# EAGLE board PololuPCBwhatonearth (EAGLE 8.3.2)
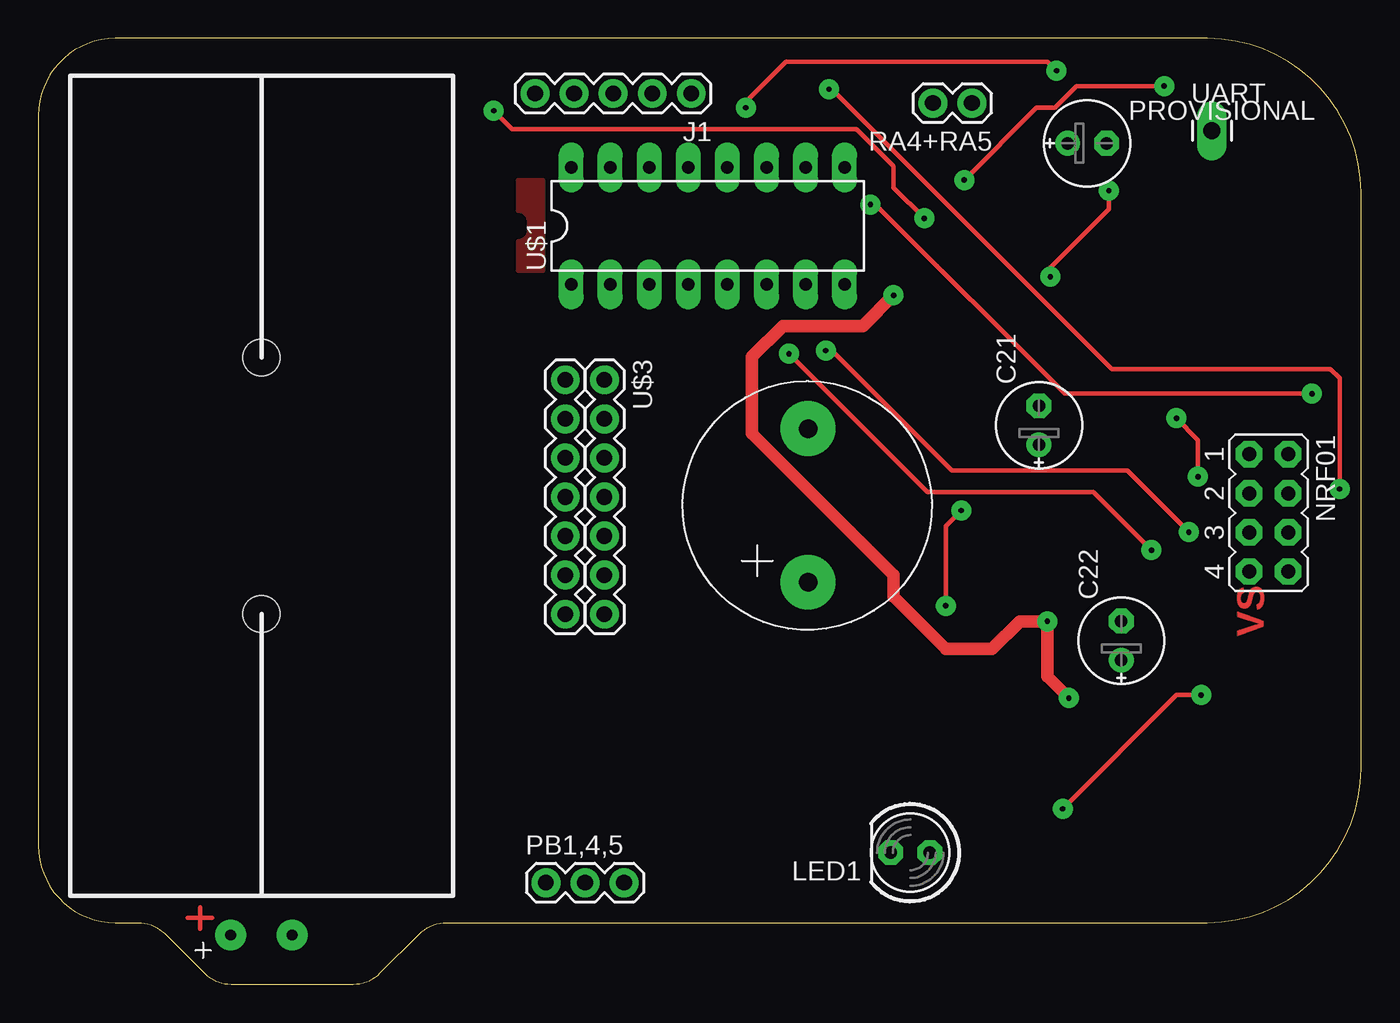
[diagram p0: board, top side]
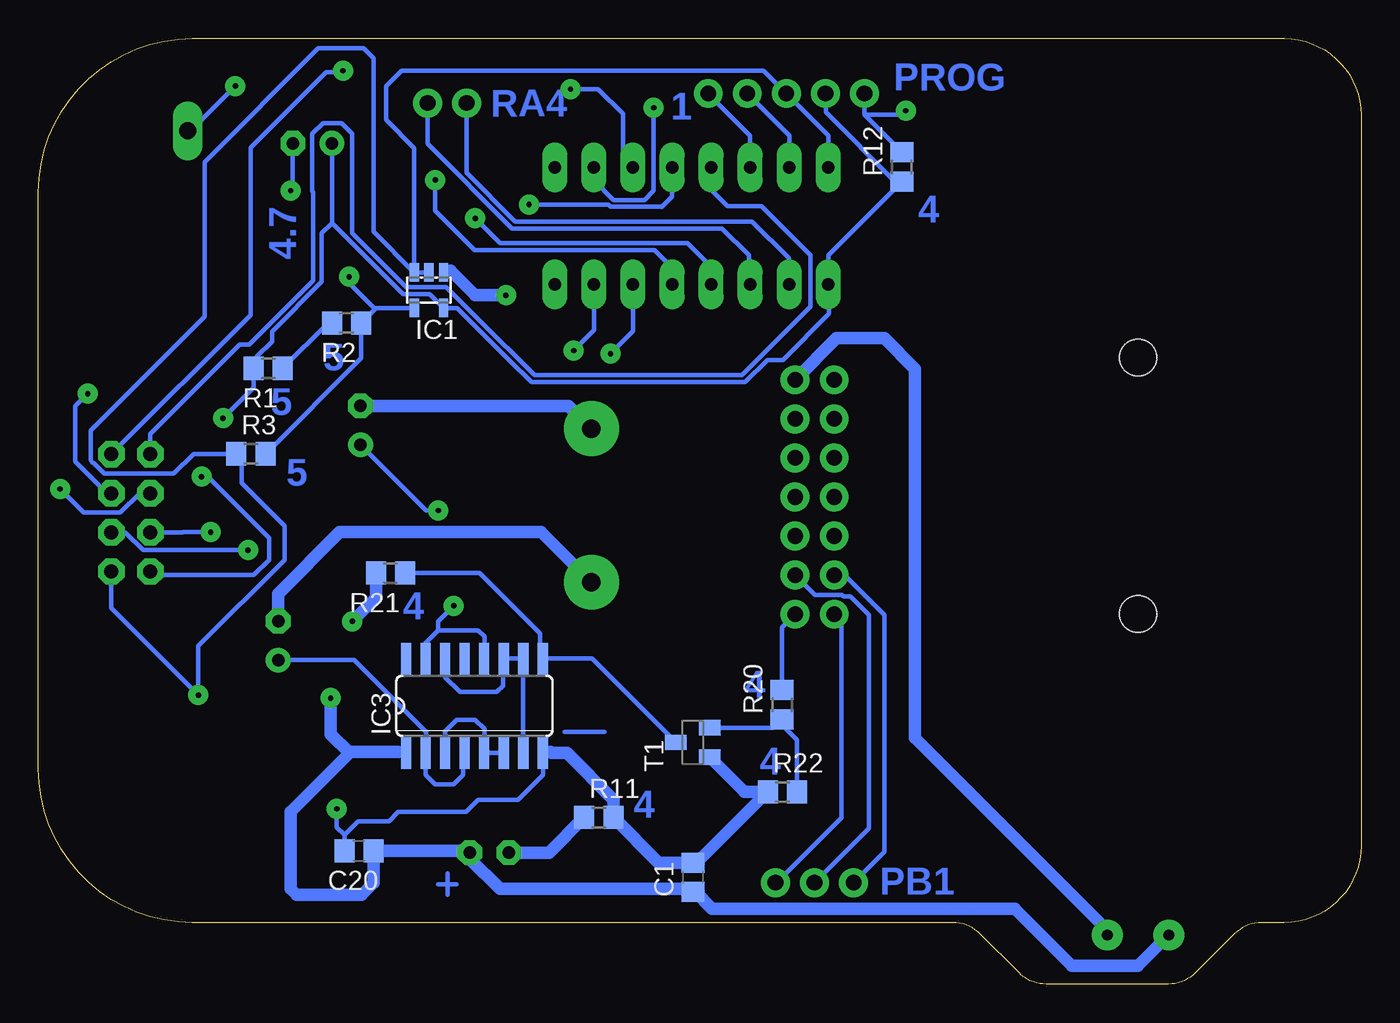
[diagram p1: board, bottom side, seen from below]

Size 86 x 61.5 mm. Coordinates in mm from the lower left corner, seen from the top.
Outline: 76,61.5 5,61.5 arc90 0,56.5 0,9 arc90 5,4 6.46,4 arc-45 8.23,3.27 10.77,0.73 arc45 12.54,0 20.46,0 arc45 22.23,0.73 24.77,3.27 arc-45 26.54,4 76,4 arc90 86,14 86,51.5 arc90 76,61.5
Copper layers (1*16): Top 0.06mm / dielectric 3mm / Bottom 0.06mm
Design rules "default *": minimum track width 0.3mm, minimum drill 0.35mm, track to track 0.15mm, track to pad 0.15mm, pad to pad 0.5mm, via to via 1mm, smd to smd 0mil, copper to edge 0.5mm, drill to drill 0.3mm, minimum pad ring 0.4mm, minimum via ring 0.4mm, stop-mask expansion 4mil, vias tented up to drill 0mil, thermal gap 10mil

## Footprints (pad centres in the part's own frame; a part is rotated, then mirrored left to right if it is on the bottom)
C0805 = smd 1.3 x 1.5: 1 -0.95,0; 2 0.95,0
E2,5-6E = drill 0.813 pad 1.575: + -1.27,0 | drill 0.813 pad 1.575 octagon: - 1.27,0
SOT23-5L = smd 0.6 x 1.2: 1 -0.95,-1.15; 2 0,-1.15; 3 0.95,-1.15; 4 0.95,1.15; 5 -0.95,1.15
SO16 = smd 0.66 x 2.032: 1 -4.445,-3.073; 2 -3.175,-3.073; 3 -1.905,-3.073; 4 -0.635,-3.073; 5 0.635,-3.073; 6 1.905,-3.073; 7 3.175,-3.073; 8 4.445,-3.073; 9 4.445,3.073; 10 3.175,3.073; 11 1.905,3.073; 12 0.635,3.073; 13 -0.635,3.073; 14 -1.905,3.073; 15 -3.175,3.073; 16 -4.445,3.073
1X05 = drill 1.016 pad 1.88: 1 0,0; 2 2.54,0; 3 5.08,0; 4 7.62,0; 5 10.16,0
LED5MM = drill 0.813 octagon: A -1.27,0; K 1.27,0
JP4Q = drill 0.914 octagon: 1 -3.81,-1.27; 2 -1.27,-1.27; 3 1.27,-1.27; 4 3.81,-1.27; 5 3.81,1.27; 6 1.27,1.27; 7 -1.27,1.27; 8 -3.81,1.27
1X03 = drill 1.016 pad 1.88: 1 0,0; 2 2.54,0; 3 5.08,0
R0805 = smd 1.3 x 1.5: 1 -0.95,0; 2 0.95,0
1X02 = drill 1.016 pad 1.88: 1 0,0; 2 2.54,0
SOT23-EBC = smd 1 x 1.4: B 0.95,-1.1; C 0,1.1; E -0.95,-1.1
DIL16 = drill 0.813 long: 1 -8.89,-3.81; 2 -6.35,-3.81; 3 -3.81,-3.81; 4 -1.27,-3.81; 5 1.27,-3.81; 6 3.81,-3.81; 7 6.35,-3.81; 8 8.89,-3.81; 9 8.89,3.81; 10 6.35,3.81; 11 3.81,3.81; 12 1.27,3.81; 13 -1.27,3.81; 14 -3.81,3.81; 15 -6.35,3.81; 16 -8.89,3.81
3V-AAA-BATTPACK = drill 0.7 pad 2: 1 0,-2; 2 0,2 | hole 2.388: -37.541,0; -20.879,0
2X07 = drill 1.016 pad 1.88: DB0 7.62,-2.54; DB1 7.62,0; DB2 10.16,-2.54; DB3 10.16,0; E 5.08,0; PB1 12.7,-2.54; PB4 12.7,0; PB5 15.24,-2.54; PD7 15.24,0; R/W 5.08,-2.54; RS 2.54,0; VDD 0,0; VO 2.54,-2.54; VSS 0,-2.54
1X01_LONGPAD = drill 1.118 pad 1.88 long: 1 0,0
ULTRASONIC-PEIZO = drill 1.2 pad 3.556: 1+ -5,0; 2- 5,0

## Placement (x,y rotation side)
C1  0.1uF  [C0805]  43.44,6.94 90 bottom
C20  0.1uF  [C0805]  65.15,8.67 180 bottom
C21  0.22uF  [E2,5-6E]  65.06,36.34 90 top
C22  0.22uF  [E2,5-6E]  70.41,22.34 90 top
IC1  TPS7700118RM  [SOT23-5L]  60.61,45.13 180 bottom
IC3  CD4049UBDRD  [SO16]  57.65,18.1 0 bottom
J1  [1X05]  42.45,57.92 180 top
LED1  [LED5MM]  56.69,8.55 180 top
NRF01  [JP4Q]  79.99,30.65 270 top
PB1,4,5  [1X03]  33,6.6 0 top
PROVISIONAL  4.7uF  [E2,5-6E]  68.19,54.68 0 top
R1  100K  [R0805]  71.06,40.05 180 bottom
R2  100K  [R0805]  65.96,43 180 bottom
R3  100K  [R0805]  72.19,34.49 0 bottom
R11  10K  [R0805]  49.57,10.84 0 bottom
R12  10K  [R0805]  29.86,53.15 90 bottom
R20  10K  [R0805]  37.65,18.18 90 bottom
R21  10K  [R0805]  63.11,26.73 180 bottom
R22  10K  [R0805]  37.62,12.5 0 bottom
RA4+RA5  [1X02]  60.7,57.3 180 top
T1  [SOT23-EBC]  43.46,15.72 90 bottom
U$1  PIC16F1503(DIL16)  [DIL16]  43.53,49.31 0 top
U$2  3V-AAA-BATTPACK  [3V-AAA-BATTPACK]  14.5,3.2 270 top
U$3  M2X7  [2X07]  36.8,39.3 270 top
UART  [1X01_LONGPAD]  76.3,55.5 0 top
US-TX  [ULTRASONIC-PEIZO]  50.04,31.13 90 top

## Library data of the parts
C1 C20-C22 PROVISIONAL = rcl
IC1 IC3 J1 NRF01 U$1-U$3 US-TX = gac_lib
LED1 = led
PB1,4,5 RA4+RA5 UART = SparkFun-Connectors
R1-R3 R11 R12 R20-R22 = resistor
T1 = transistor

## Nets
N$1: IC3.9 R21.1 T1.C
N$2: R20.2 U$3.PD7
N$3: IC3.7 IC3.10 IC3.11 IC3.14
N$4: IC3.3 IC3.5 IC3.6
N$5: C22.+ IC3.2 IC3.4
N$6: C1.2 C20.2 IC1.2 IC1.3 IC3.8 J1.3 NRF01.5 R3.1 R11.2 R22.1 T1.E U$1.16
N$7: C21.+ IC3.12 IC3.15
N$8: R20.1 R22.2 T1.B
N$9: IC1.5 J1.4 NRF01.4 PROVISIONAL.+ R1.2 R12.1 U$1.1
N$10: IC1.4 PROVISIONAL.- R2.1 R3.2
N$11: NRF01.1 U$1.13
N$12: NRF01.8 U$1.10
N$13: NRF01.3 U$1.7
N$14: R1.1 R2.2
N$15: NRF01.6 U$1.6
N$16: NRF01.2 U$1.11
N$17: NRF01.7 U$1.12
N$18: J1.2 U$1.15
N$19: J1.1 U$1.14
N$20: J1.5 R12.2 U$1.4
N$21: LED1.K R11.1
N$22: C22.- US-TX.1+
N$23: C21.- US-TX.2-
N$24: C1.1 C20.1 IC1.1 IC3.1 LED1.A R21.2 U$2.1
N$27: U$2.2 U$3.VDD
N$28: U$1.5 UART.1
N$29: RA4+RA5.2 U$1.2
N$30: RA4+RA5.1 U$1.3
N$31: PB1,4,5.2 U$3.PB4
N$32: PB1,4,5.1 U$3.PB1
N$33: PB1,4,5.3 U$3.PB5

## Tracks (layer width: path | path; a pad name or v marks a point on that pad's centre or on a via)
N$1
  Bottom 0.305: T1.C 50.01,21.17 IC3.9 53.4,21.37 53.4,22.8 57.33,26.73 R21.1
N$2
  Bottom 0.305: R20.2 37.65,23.21 U$3.PD7
N$3
  Bottom 0.305: IC3.7 IC3.10 IC3.11 55.8,21.12 55.8,19.4 56.2,19 58.6,19 59.55,19.95 IC3.14
N$4
  Bottom 0.305: IC3.6 IC3.5 57,15.04 57,16.6 57.6,17.2 58.8,17.2 59.55,16.45 IC3.3
N$5
  Bottom 0.305: IC3.4 58.4,14.91 58.4,13.6 59,13 60.2,13 60.83,13.62 IC3.2 60.8,15.05 60.8,16.4 65.47,21.07 C22.+
N$6  (via drill 0.35 pad 1.3)
  Top 0.305: v66.6,11.4 74,18.8 v75.6,18.8
  Bottom 0.305: U$1.16 34.64,55.19 J1.3 38.85,59.4 62.4,59.4 63.4,58.4 63.4,56.2 61.56,54.36 IC1.3 | 38.6,12.5 R22.1 | 43.21,7.89 C1.2 | R11.2 48.6,10.86 | IC3.8 53.2,13.6 54.8,12 57.4,12 58.2,11.2 62.6,11.2 63.2,10.6 65.2,10.6 66.1,9.7 | 66.1,9.7 C20.2 | IC1.3 IC1.2 | 66.1,9.7 66.6,10.2 v66.6,11.4 | NRF01.5 81.26,24.46 v75.6,18.8 75.6,22 70,27.6 70,29.8 72.8,32.6 72.8,34.15 R3.1 75.91,34.49 77.2,33.2 81.74,33.2 82.42,33.88 82.52,33.92 82.6,34.1 82.6,36 75.2,43.4 75.2,53.45 67.8,60.85 64.85,60.85 64.2,60.2 64.2,48.92 IC1.3
  Bottom 0.61: 52.7,15.1 53.13,15.1 IC3.8
  Bottom 0.813: T1.E 40.09,12.5 38.6,12.5 43.21,7.89 | C1.2 45.67,7.89 R11.2 | 48.6,10.86 48.6,12 51.63,15.03 52.63,15.03 52.7,15.1
N$7  (via drill 0.35 pad 1.3)
  Top 0.305: v60,30.8 59,29.8 v59,24.6
  Bottom 0.305: IC3.12 57,21.19 57,22.6 57.4,23 60,23 | 60,23 60.83,22.18 IC3.15 | C21.+ 60.79,30.8 v60,30.8 | v59,24.6 60,23.6 60,23
N$8
  Bottom 0.305: T1.B 38.21,16.67 37.84,17.04 | 37.84,17.04 R20.1 | R22.2 36.67,15.87 37.84,17.04
N$9  (via drill 0.35 pad 1.3)
  Top 0.305: v74,36.8 75.4,35.4 v75.4,33
  Bottom 0.305: 66.9,49.5 66.92,49.52 PROVISIONAL.+ | NRF01.4 78.48,26.6 72,26.6 71,27.6 71,29 75,33 v75.4,33 | v74,36.8 72.01,38.79 R1.2 71.8,40.26 71.8,40.8 70.8,41.8 70.8,42.44 67.57,45.67 67.57,48.83 66.9,49.5 | 66.9,49.5 62.28,44.88 60.56,44.88 IC1.5 58.78,43.98 55.4,40.6 55.39,40.6 53.93,39.15 40.07,39.15 38.61,40.6 37.6,40.6 34.6,43.6 34.6,45.46 U$1.1 34.64,47.42 R12.1 30.3,52.2 34.8,56.7 34.8,57.89 J1.4
N$10  (via drill 0.35 pad 1.3)
  Top 0.305: v69.6,51.6 69.6,50.4 65.8,46.6 v65.8,46
  Bottom 0.305: 64.11,43.91 R2.1 65.01,40.72 R3.2 | 64.11,43.91 64.03,43.98 IC1.4 | v69.6,51.6 69.46,51.74 PROVISIONAL.- | 64.11,43.91 65.8,45.6 v65.8,46
N$11
  Bottom 0.305: U$1.13 42.26,51.66 41.2,50.6 39,50.6 35.8,47.4 35.8,44.05 40.26,39.6 53.74,39.6 57.4,43.26 57.41,43.26 59.49,45.34 62.09,45.34 65.6,48.84 65.6,55.3 66.3,56 67.5,56 68.2,55.3 68.2,51.56 68.14,51.49 68.14,45.75 72.29,41.6 72.9,41.6 78.72,35.78 NRF01.1
N$12  (via drill 0.35 pad 1.3)
  Top 0.305: v46,57 46,57.4 48.6,60 65.6,60 v66.2,59.4
  Bottom 0.305: NRF01.8 72.2,43.52 72.2,54.4 67.3,59.3 66.3,59.3 v66.2,59.4 | v46,57 46,51.6 46.6,51 48.6,51 49.88,52.28 U$1.10
N$13  (via drill 0.35 pad 1.3)
  Top 0.305: v51.2,41.2 51.6,41.2 59.4,33.4 70.8,33.4 v74.8,29.4
  Bottom 0.305: NRF01.3 76.62,29.38 76.6,29.4 v74.8,29.4 | U$1.7 49.88,42.52 v51.2,41.2
N$14
  Bottom 0.305: R1.1 67.16,43 R2.2
N$15  (via drill 0.35 pad 1.3)
  Top 0.305: v48.8,41 57.8,32 68.6,32 v72.38,28.22
  Bottom 0.305: NRF01.6 80.36,29.38 79.2,28.22 v72.38,28.22 | U$1.6 47.34,42.46 v48.8,41
N$16  (via drill 0.35 pad 1.3)
  Top 0.305: v84.6,32.2 84.6,39.4 84,40 69.8,40 51.6,58.2 v51.4,58.2
  Bottom 0.305: U$1.11 48,53.78 48,56.6 49.6,58.2 v51.4,58.2 | NRF01.2 79.42,31.92 80.68,30.66 83.06,30.66 v84.6,32.2
N$17  (via drill 0.35 pad 1.3)
  Top 0.305: v82.8,38.4 66.73,38.4 54.6,50.53 54.27,50.53 v54.1,50.7
  Bottom 0.305: v82.8,38.4 83.6,37.6 83.6,34 81.52,31.92 NRF01.7 | U$1.12 44.8,51.2 45.47,50.53 45.49,50.55 48.79,50.55 48.94,50.7 v54.1,50.7
N$18
  Bottom 0.305: U$1.15 37.18,55.19 J1.2
N$19
  Bottom 0.305: U$1.14 39.72,55.19 J1.1
N$20  (via drill 0.35 pad 1.3)
  Top 0.305: v57.6,49.8 55.6,51.8 55.6,53.2 53.2,55.6 30.8,55.6 v29.6,56.8
  Bottom 0.305: 32.29,56.53 R12.2 | 32.29,56.53 J1.5 | U$1.4 42.4,45.64 42.4,46.8 43.8,48.2 56,48.2 v57.6,49.8 57.6,50 | v29.6,56.8 29.87,56.53 32.29,56.53
N$21
  Bottom 0.813: R11.1 52.81,8.55 LED1.K
N$22
  Bottom 0.813: US-TX.1+ 53.31,29.4 66.4,29.4 70.41,25.39 C22.-
N$23
  Bottom 0.813: US-TX.2- 51.52,37.61 C21.-
N$24  (via drill 0.35 pad 1.3)
  Top 0.813: v67,18.6 65.6,20 v65.6,23.6 63.8,23.6 62,21.8 59,21.8 55.6,25.2 55.6,26.6 46.4,35.8 46.4,40.8 48.4,42.8 53.6,42.8 v55.6,44.8
  Bottom 0.305: C1.1 43.65,6.2 | 57.96,8.16 LED1.A 58.08,8.67 | 62.6,15.1 62.53,15.03 IC3.1
  Bottom 0.406: IC1.1 59.54,46.4 59.2,46.4
  Bottom 0.813: 43.65,6.2 56,6.2 57.96,8.16 | 58.08,8.67 C20.1 64.2,6.6 65,5.8 69.2,5.8 69.6,6.2 69.6,11.2 65.77,15.03 | U$2.1 14.5,1.2 18.8,1.2 22.51,4.91 42.2,4.91 43.28,5.99 C1.1 | 65.77,15.03 67,16.25 v67,18.6 | v65.6,23.6 64.06,25.14 R21.2 | 59.2,46.4 57.6,44.8 v55.6,44.8 | 65.77,15.03 65.7,15.1 62.6,15.1
N$25
  Top 0.305: 10.5,5 10.5,3.6
N$26
  Top 0.305: 9.7,4.3 11.3,4.3
N$27
  Bottom 0.813: U$2.2 16.5,3.5 29,16 29,40 31,42 34.1,42 U$3.VDD
N$28  (via drill 0.35 pad 1.3)
  Top 0.305: 60.2,52.77 v60.2,52.3 64.9,57 66.1,57 67.5,58.4 v73.2,58.4
  Bottom 0.305: U$1.5 44.8,46.6 45.95,47.74 57.65,47.74 60.2,50.3 v60.2,52.3 | v73.2,58.4 76.1,55.5 UART.1
N$29
  Bottom 0.305: U$1.2 37.2,45.52 37.2,47.2 39.6,49.6 55,49.6 58.16,52.76 RA4+RA5.2
N$30
  Bottom 0.305: U$1.3 39.8,45.58 39.8,47.4 41.55,49.15 55.19,49.15 60.7,54.66 RA4+RA5.1
N$31
  Bottom 0.305: PB1,4,5.2 32,10.14 32,24 33.2,25.2 33.64,25.2 33.74,25.3 35.5,25.3 U$3.PB4
N$32
  Bottom 0.305: PB1,4,5.1 31,8.6 31,24 33.6,26.6 U$3.PB1
N$33
  Bottom 0.305: PB1,4,5.3 38,6.6 33.8,10.8 33.8,23.6 U$3.PB5
N$34
  Bottom 0.305: 49.2,16.4 51.8,16.4
N$35
  Bottom 0.305: 59.4,7.2 59.4,5.8
N$36
  Bottom 0.305: 58.8,6.5 60,6.5
N$37
  pour Top: 31.2,52.3 32.8,52.3 32.8,46.4 31.2,46.4 31.2,48.3 arc90 31.9,49 31.9,49.6 arc90 31.2,50.3

## Text on the board
Top: VS
Bottom: PROG | 1 | RA4 | 4.7 | 4 | 5 | 5 | 5 | 4 | 4 | 4 | 4 | PB1